# EAGLE board groundhog-thr-REVA (EAGLE 6.5.0)

Size 38.86 x 12.95 mm. Coordinates in mm from the lower left corner, seen from the top.
Outline: 0,5.59 0,12.95 38.86,12.95 38.86,0 10.67,0 10.67,5.59 0,5.59
Copper layers (1*16): Top 0.035mm / dielectric 1.5mm / Bottom 0.035mm
Design rules "default": minimum track width 10mil, minimum drill 24mil, track to track 8mil, track to pad 8mil, pad to pad 8mil, via to via 8mil, smd to smd 8mil, copper to edge 40mil, drill to drill 8mil, minimum pad ring 10mil, minimum via ring 8mil, stop-mask expansion 4mil, vias tented up to drill 0mil, thermal gap 10mil
Net classes: 0 Default: width 0.203 mm; 1 GND: width 0.203 mm, drill 0.305 mm, clearance 0.152 mm; 3 3V3-PI: width 0.203 mm, drill 0.305 mm, clearance 0.152 mm; 4 5V-PI: width 0.203 mm, drill 0.305 mm, clearance 0.152 mm

## Footprints (pad centres in the part's own frame; a part is rotated, then mirrored left to right if it is on the bottom)
C0805 = smd 1.3 x 1.5: 1 -0.85,0; 2 0.85,0
1X04 = drill 1.016 pad 1.88 square: 1 0,0 | drill 1.016 pad 1.88: 2 2.54,0; 3 5.08,0; 4 7.62,0
1X13 = drill 1.016 pad 1.88: 1 0,0; 2 2.54,0; 3 5.08,0; 4 7.62,0; 5 10.16,0; 6 12.7,0; 7 15.24,0; 8 17.78,0; 9 20.32,0; 10 22.86,0; 11 25.4,0; 12 27.94,0; 13 30.48,0
R0805 = smd 1.1 x 1.4: 1 -1,0; 2 1,0
2X4 = drill 1.016 pad 1.88 octagon: 1 -3.81,-1.27; 2 -3.81,1.27; 3 -1.27,-1.27; 4 -1.27,1.27; 5 1.27,-1.27; 6 1.27,1.27; 7 3.81,-1.27; 8 3.81,1.27

## Placement (x,y rotation side)
CRAD  .1uF  [C0805]  25.15,4.57 270 top
DHT  [1X04]  37.08,11.18 270 top
DHTC  .1uF  [C0805]  33.02,4.57 270 top
JP1  M13  [1X13]  1.52,11.18 0 top
JP2  M13  [1X13]  1.52,8.64 0 top
R1  10K  [R0805]  28.96,4.57 270 top
U$1  M04X2  [2X4]  16.26,3.05 180 top

## Library data of the parts
CRAD DHTC R1 = adafruit
DHT JP1 JP2 U$1 = SparkFun-Connectors

## Nets
3V3-PI [3V3-PI]: CRAD.1 DHT.1 DHTC.1 JP2.1 R1.1 U$1.2
5V-PI [5V-PI]: JP1.13
GND [GND]: CRAD.2 DHT.3 DHT.4 DHTC.2 JP1.11 U$1.1
GPIO4: DHT.2 JP2.4 R1.2
GPIO17: JP2.6
GPIO18: JP1.8
GPIO21: JP2.7
GPIO22: JP2.8
GPIO23: JP1.6
GPIO24: JP1.5
GPIO25: JP1.3 U$1.3
MISO-PI: JP2.11 U$1.7
MOSI-PI: JP2.10 U$1.6
N$3: U$1.8
RXD-PI: JP1.9
SCL-PI: JP2.3
SCLK-PI: JP2.12 U$1.5
SDA-PI: JP2.2
SPI_CE0: JP1.2 U$1.4
SPI_CE1: JP1.1
TXD-PI: JP1.10

## Tracks (layer width: path | path; a pad name or v marks a point on that pad's centre or on a via)
3V3-PI  (5 unrouted)
GND  (5 unrouted)
GPIO4  (2 unrouted)
GPIO25  (1 unrouted)
MISO-PI  (1 unrouted)
MOSI-PI  (1 unrouted)
SCLK-PI  (1 unrouted)
SPI_CE0  (1 unrouted)

## Text on the board
tPlace: REVA | GROUNDHOG-THR